# EAGLE board trigger (EAGLE 9.6.2)

Size 45 x 28 mm. Coordinates in mm from the lower left corner, seen from the top.
Outline: 35,28 0,28 0,2 5,0 10,5 30,6 34,12 41,13 45,16 44,24 44,25 35,28
Copper layers (1*16): Top 0.035mm / dielectric 1.5mm / Bottom 0.035mm
Design rules "default": minimum track width 6mil, minimum drill 0.35mm, track to track 6mil, track to pad 6mil, pad to pad 6mil, via to via 6mil, smd to smd 6mil, copper to edge 40mil, drill to drill 6mil, minimum pad ring 10mil, minimum via ring 8mil, stop-mask expansion 4mil, vias tented up to drill 0mil, thermal gap 10mil

## Footprints (pad centres in the part's own frame; a part is rotated, then mirrored left to right if it is on the bottom)
E5-6 = drill 0.813 pad 1.905: + -2.54,0 | drill 0.813 pad 1.905 octagon: - 2.54,0
C0805 = smd 1.3 x 1.5: 1 -0.95,0; 2 0.95,0
JST-PH-2-THM = drill 0.8 pad 1.422: 1 1,0; 2 -1,0
DO214AC = smd 1.8 x 1.7: A 2.05,0; C -2.05,0
SO16 = smd 0.66 x 2.032: 1 -4.445,-3.073; 2 -3.175,-3.073; 3 -1.905,-3.073; 4 -0.635,-3.073; 5 0.635,-3.073; 6 1.905,-3.073; 7 3.175,-3.073; 8 4.445,-3.073; 9 4.445,3.073; 10 3.175,3.073; 11 1.905,3.073; 12 0.635,3.073; 13 -0.635,3.073; 14 -1.905,3.073; 15 -3.175,3.073; 16 -4.445,3.073
LED3MM = drill 0.813 pad 1.676 octagon: A -1.27,0; K 1.27,0
SOT223 = smd 1.219 x 2.235: 1 -2.311,-3.099; 2 0,-3.099; 3 2.311,-3.099 | smd 3.6 x 2.2: 4 0,3.099
R1206 = smd 1.6 x 1.803: 1 -1.422,0; 2 1.422,0
R0805 = smd 1.3 x 1.5: 1 -0.95,0; 2 0.95,0
SOT23 = smd 1 x 1.4: 1 -0.95,-1.1; 2 0.95,-1.1; 3 0,1.1
A23 = drill 1.5 pad 3.81: GND 2,6.5; VCC 34,6.5
PUSH-SWITCH = drill 0.8: P$1 0.75,0.75; P$2 3,0.75; P$3 5.25,0.75; P$4 5.25,5.25; P$5 0.75,5.25; P$6 3,5.25

## Placement (x,y rotation side)
C1  [E5-6]  23,11 270 top
C2  [C0805]  -26.67,38.1 0 top  (outside the outline)
CN1  [JST-PH-2-THM]  28.95,11.25 90 top
CN2  [JST-PH-2-THM]  41.06,20.22 90 top
D1  [DO214AC]  -36.83,25.4 0 top  (outside the outline)
IC1  4538D  [SO16]  -19.05,19.05 0 top  (outside the outline)
LED1  [LED3MM]  9.6,11.52 90 top
Q1  [SOT223]  -35.56,5.08 0 top  (outside the outline)
R2  [R1206]  -21.59,33.02 0 top  (outside the outline)
R3  [R1206]  -26.67,33.02 0 top  (outside the outline)
R5  [R1206]  -31.75,33.02 0 top  (outside the outline)
R7  [R1206]  -36.83,33.02 0 top  (outside the outline)
R8  [R1206]  -41.91,33.02 0 top  (outside the outline)
R9  [R1206]  -15.24,38.1 0 top  (outside the outline)
R10  [R0805]  -16.51,33.02 0 top  (outside the outline)
R11  [R0805]  -21.59,38.1 0 top  (outside the outline)
T1  BC847  [SOT23]  -35.56,38.1 0 top  (outside the outline)
T2  BC847  [SOT23]  -20.32,43.18 0 top  (outside the outline)
U$1  A23BATTERY  [A23]  0,15 0 top
U$3  PUSH-SWITCH  [PUSH-SWITCH]  1,8 0 top

## Library data of the parts
C1 = rcl; SPICEPREFIX: C
C2 = eagle-ltspice; SPICEMODEL: NONE; SPICEPREFIX: C
CN1 CN2 LED1 = adafruit
D1 = diode
IC1 = 45xx
Q1 = m-pad-2.1
R2 R3 R5 R7-R11 = eagle-ltspice; SPICEMODEL: NONE; SPICEPREFIX: R
T1 T2 = nxp_60
U$1 U$3 = zort-library

## Nets
GND: C1.- C2.1 CN2.2 IC1.1 IC1.12 IC1.15 Q1.3 T1.2 T2.2 U$1.GND
N$1: LED1.K T1.3
N$2: CN2.1 R3.2
N$3: IC1.4 R3.1 R5.2
N$4: IC1.6 R7.1 R8.1
N$5: Q1.2 R9.1
N$6: R8.2 T2.1
N$7: CN1.1 D1.A R9.2
N$8: R11.1 T1.1 T2.3
N$9: LED1.A R10.1
N$11: U$1.VCC U$3.P$3 U$3.P$4
N$12: Q1.1 R7.2
VCC: C1.+ C2.2 CN1.2 D1.C IC1.2 IC1.3 IC1.5 IC1.11 IC1.13 R2.1 R2.2 R5.1 R10.2 R11.2 U$3.P$2 U$3.P$6
VDD: IC1.16
VSS: IC1.8

## Tracks (layer width: path | path; a pad name or v marks a point on that pad's centre or on a via)
GND  (9 unrouted)
N$1  (1 unrouted)
N$2  (1 unrouted)
N$3  (2 unrouted)
N$4  (2 unrouted)
N$5  (1 unrouted)
N$6  (1 unrouted)
N$7  (2 unrouted)
N$8  (2 unrouted)
N$9  (1 unrouted)
N$11  (2 unrouted)
N$12  (1 unrouted)
VCC  (15 unrouted)